# EAGLE board BAHIA (EAGLE 9.6.2)
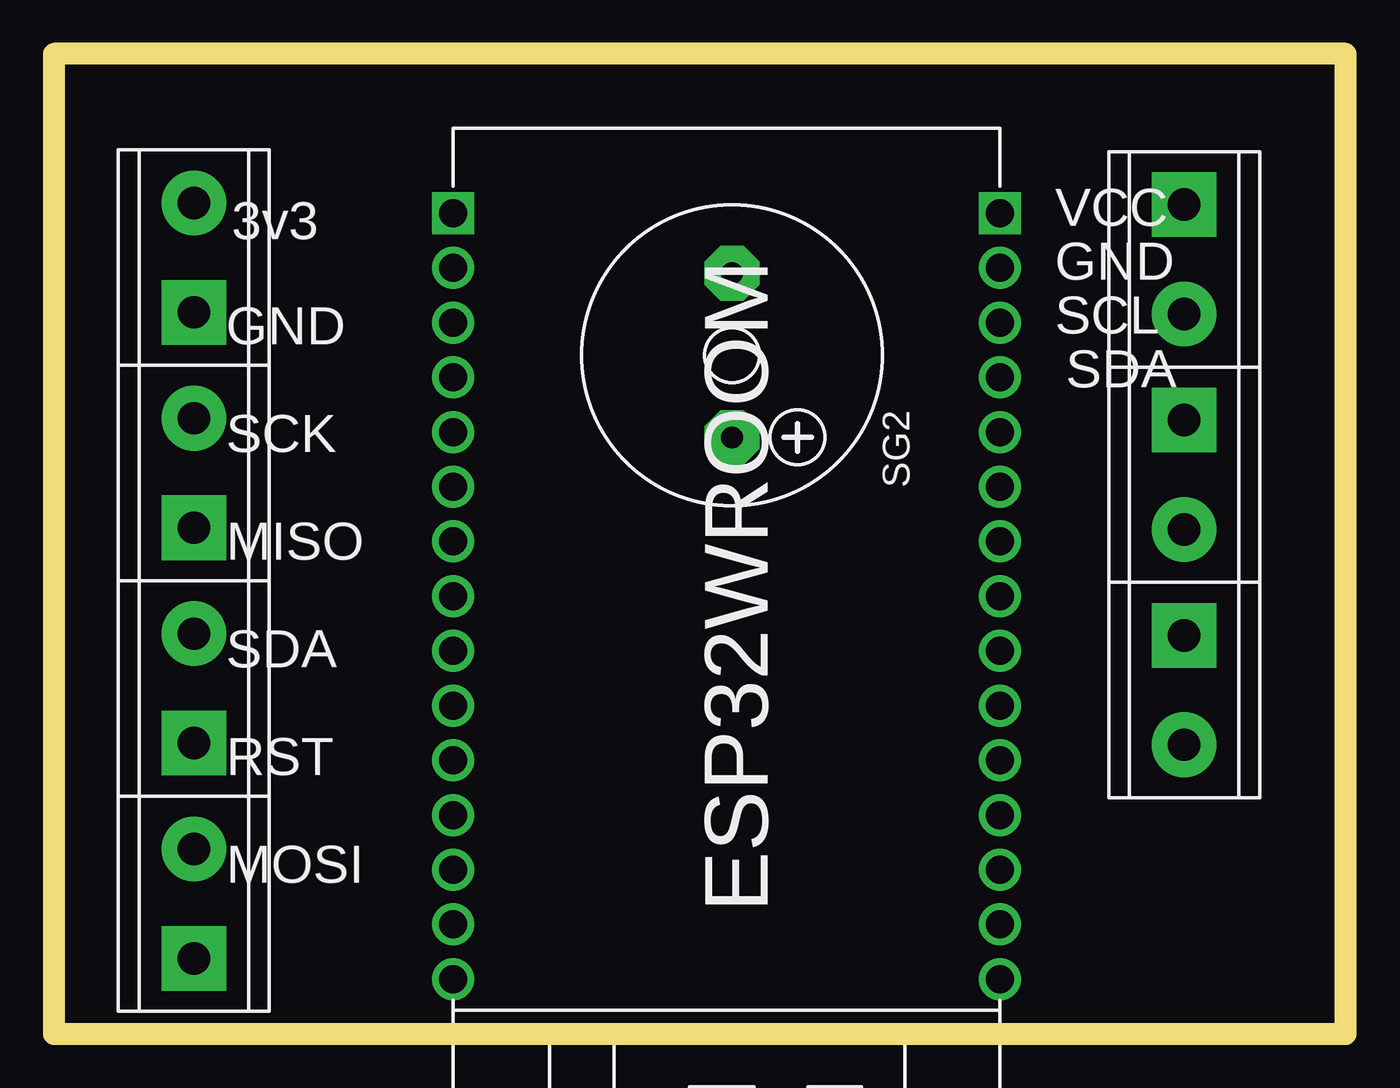
[diagram p0: board, top side]
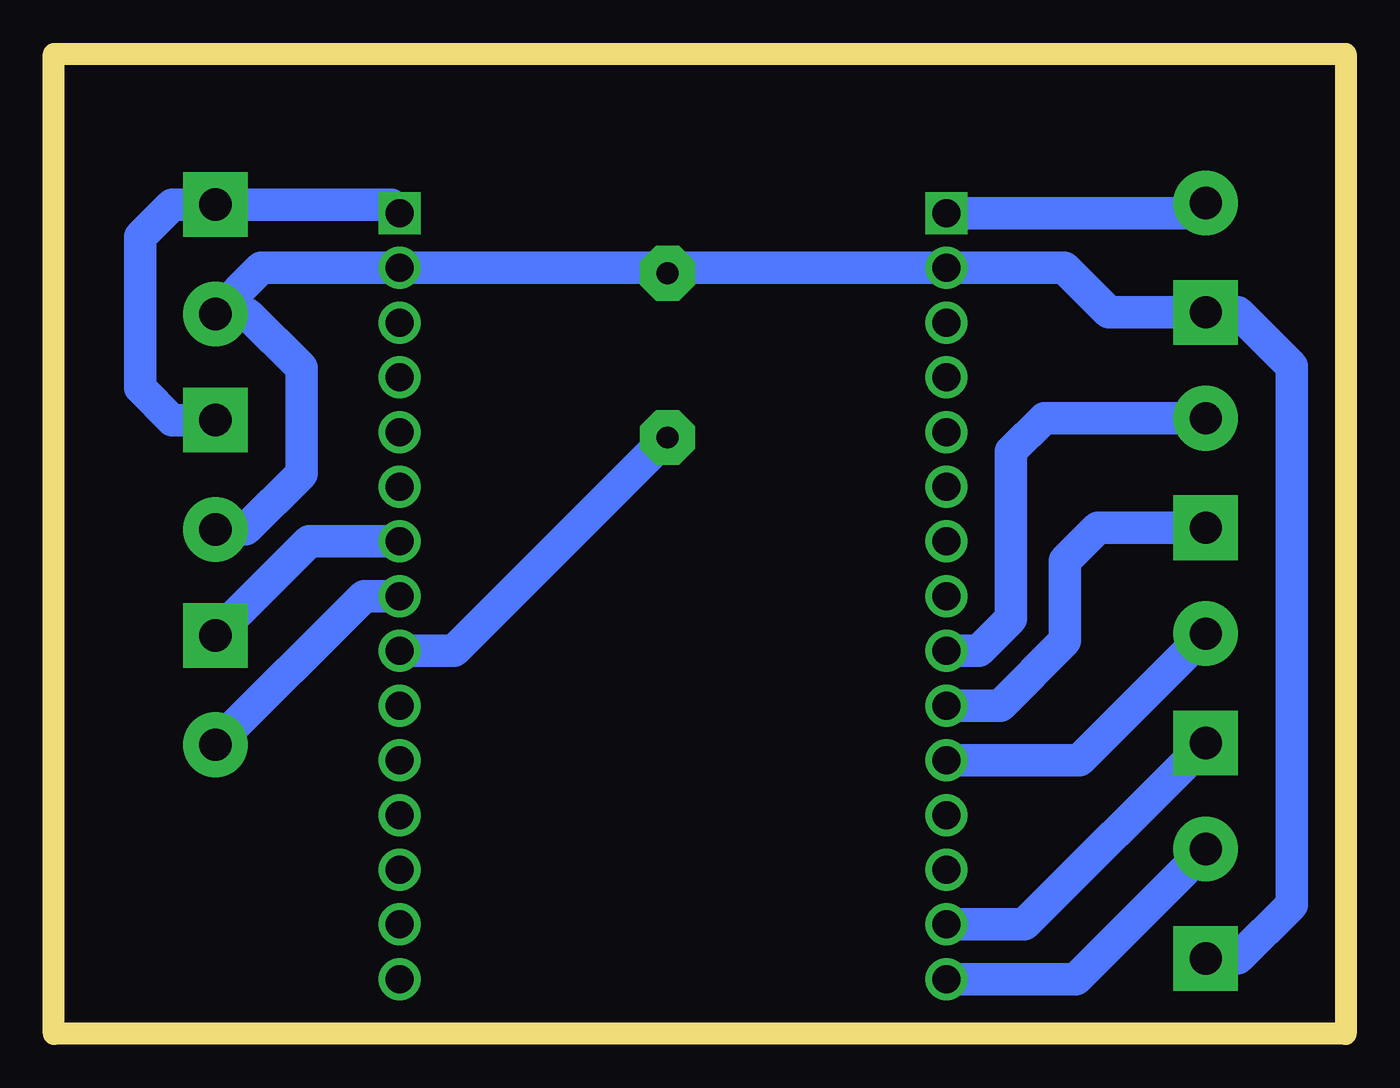
[diagram p1: board, bottom side, seen from below]

Size 60 x 45.5 mm. Coordinates in mm from the lower left corner, seen from the top.
Outline: 0,0 60,0 60,45.5 0,45.5 0,0
Copper layers (1*16): Top 0.035mm / dielectric 1.5mm / Bottom 0.035mm
Design rules "default": minimum track width 6mil, minimum drill 0.35mm, track to track 6mil, track to pad 6mil, pad to pad 6mil, via to via 6mil, smd to smd 6mil, copper to edge 40mil, drill to drill 6mil, minimum pad ring 10mil, minimum via ring 8mil, stop-mask expansion 4mil, vias tented up to drill 0mil, thermal gap 10mil

## Footprints (pad centres in the part's own frame; a part is rotated, then mirrored left to right if it is on the bottom)
F/CM12P = drill 1.016 pad 2.54 octagon: + 3.81,0; - -3.81,0
ESP32WROOM = drill 1.3 square: 3V3 0,25.4; VIN 0,0 | drill 1.3: D2 -7.62,25.4; D4 -10.16,25.4; D5 -17.78,25.4; D12 -7.62,0; D13 -5.08,0; D14 -10.16,0; D15 -5.08,25.4; D18 -20.32,25.4; D19 -22.86,25.4; D21 -25.4,25.4; D22 -33.02,25.4; D23 -35.56,25.4; D25 -17.78,0; D26 -15.24,0; D27 -12.7,0; D32 -22.86,0; D33 -20.32,0; D34 -27.94,0; D35 -25.4,0; EN -35.56,0; GND@0 -2.54,0; GND@1 -2.54,25.4; RX0 -27.94,25.4; RX2 -12.7,25.4; TX0 -30.48,25.4; TX2 -15.24,25.4; VN -30.48,0; VP -33.02,0
CLEMAS = drill 1.5 pad 3 square: 1 0,0 | drill 1.5 pad 3: 2 5.08,0

## Placement (x,y rotation side)
SG2  F/CM12P  [F/CM12P]  31.5,31.5 270 top
U$1  ESP32WROOM  [ESP32WROOM]  43.94,38.1 90 top
U$2  CLEMAS  [CLEMAS]  6.5,3.5 90 top
U$3  CLEMAS  [CLEMAS]  6.5,13.5 90 top
U$4  CLEMAS  [CLEMAS]  6.5,23.5 90 top
U$5  CLEMAS  [CLEMAS]  6.5,33.5 90 top
U$6  CLEMAS  [CLEMAS]  52.5,38.5 270 top
U$7  CLEMAS  [CLEMAS]  52.5,28.5 270 top
U$8  CLEMAS  [CLEMAS]  52.5,18.5 270 top

## Library data of the parts
SG2 = buzzer; OC_FARNELL: unknown; OC_NEWARK: unknown
U$1-U$8 = MODULAR

## Nets
3V3: U$1.3V3 U$5.2
BUZZER: SG2.+ U$1.D33
GND: SG2.- U$1.GND@0 U$1.GND@1 U$2.1 U$5.1 U$6.2 U$7.2
MISO: U$1.D19 U$4.1
MOSI: U$1.D23 U$2.2
RST: U$1.D22 U$3.1
SCK: U$1.D18 U$4.2
SCL: U$1.D26 U$8.1
SDA: U$1.D21 U$3.2
SDA_I2C: U$1.D25 U$8.2
VCC: U$1.VIN U$6.1 U$7.1

## Tracks (layer width: path | path; a pad name or v marks a point on that pad's centre or on a via)
3V3
  Bottom 1.5: U$1.3V3 6.98,38.1 U$5.2
BUZZER
  Bottom 1.5: SG2.+ 41.41,17.78 U$1.D33
GND
  Bottom 1.5: U$2.1 5,3.5 2.5,6 2.5,31 5,33.5 U$5.1 11,33.5 13.06,35.56 U$1.GND@1 31.25,35.56 SG2.- 31.75,35.56 U$1.GND@0 50.36,35.56 U$6.2 51,33.42 48.5,30.92 48.5,26 51.08,23.42 U$7.2
MISO
  Bottom 1.5: U$1.D19 16.04,15.24 13.04,18.24 13.04,21.96 11.5,23.5 U$4.1
MOSI
  Bottom 1.5: U$1.D23 12.54,2.54 U$2.2
RST
  Bottom 1.5: U$1.D22 14.92,5.08 U$3.1
SCK
  Bottom 1.5: U$1.D18 17.04,17.78 15.54,19.28 15.54,27.04 14,28.58 U$4.2
SCL
  Bottom 1.5: U$1.D26 48.14,22.86 U$8.1
SDA
  Bottom 1.5: U$1.D21 12.38,12.7 U$3.2
SDA_I2C
  Bottom 1.5: U$1.D25 45.6,20.32 U$8.2
VCC
  Bottom 1.5: U$1.VIN 44.34,38.5 U$6.1 54.5,38.5 56,37 56,30 54.5,28.5 U$7.1

## Text on the board
tPlace: VCC | 3v3 | GND | GND | SCL | SDA | SCK | MISO | SDA | RST | MOSI